# Altium PCB Multi_HUTSCHIENE_1_1.PcbDoc (part 1 of 2)
Units mm, origin at the board's own origin, x right, y up, seen from the top; angles counter-clockwise.
Board outline 29.21 x 81.99 mm, 4 copper layers (Top Layer, 3V3, GND, Bottom Layer), stack 0.778 mm thick; 60 components, 54 nets, 683 pads, 83 vias.
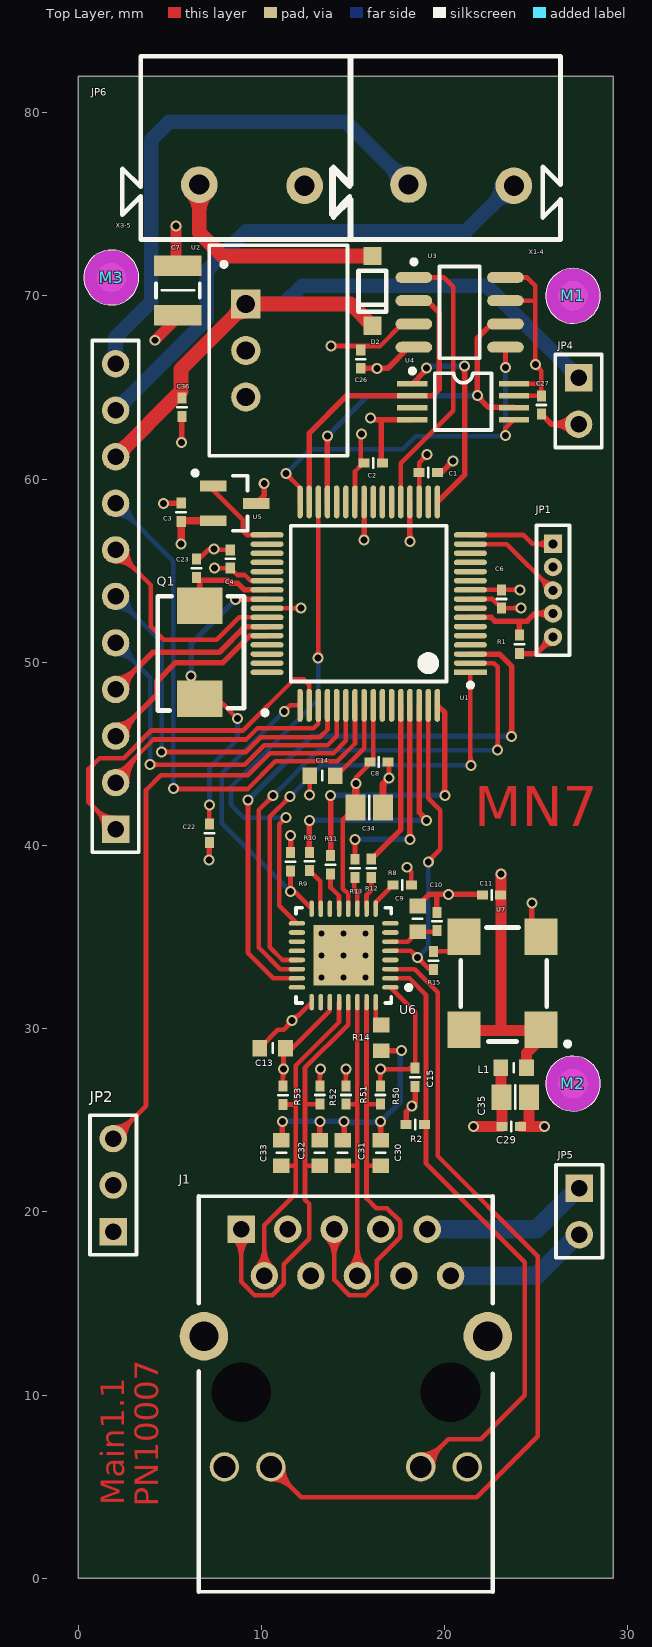
[diagram p0: Top Layer view]
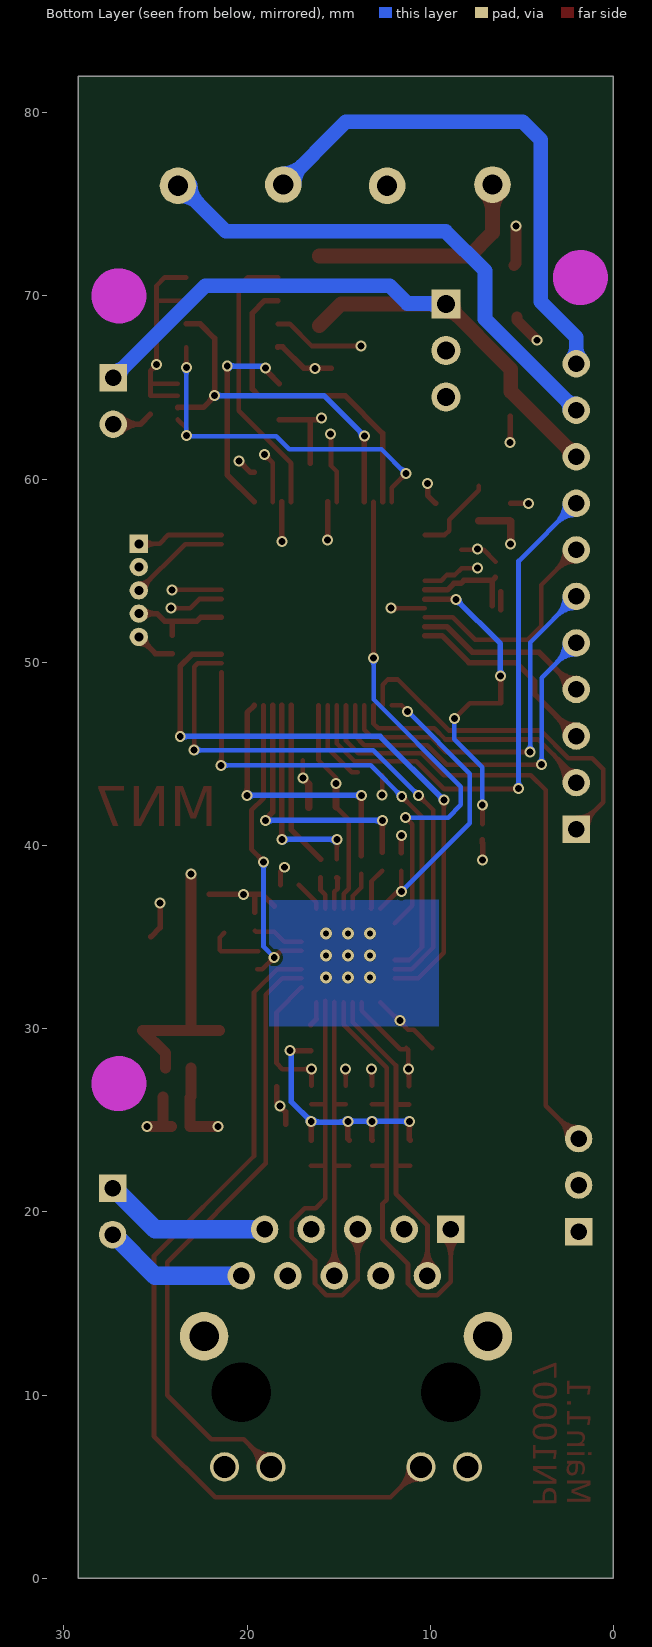
[diagram p1: Bottom Layer view, seen from below]
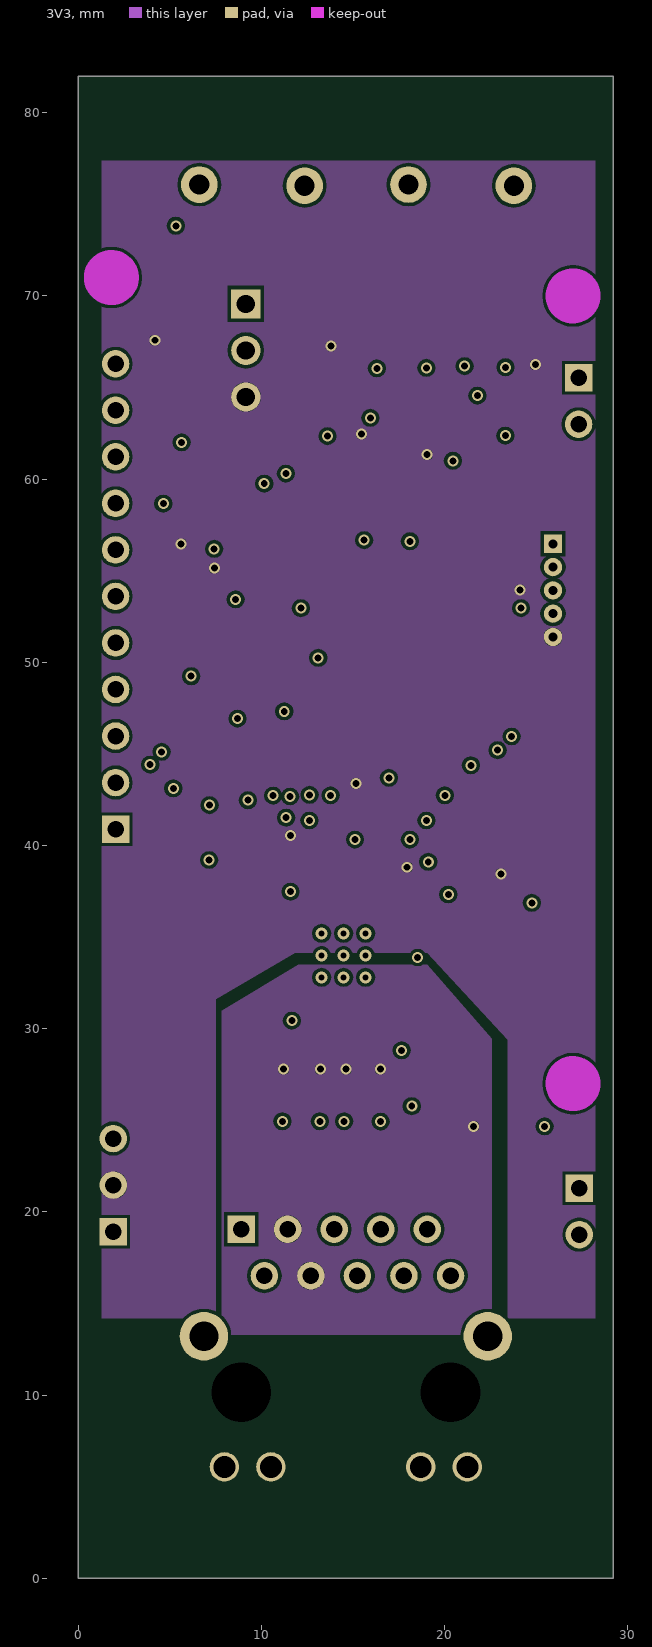
[diagram p2: 3V3]
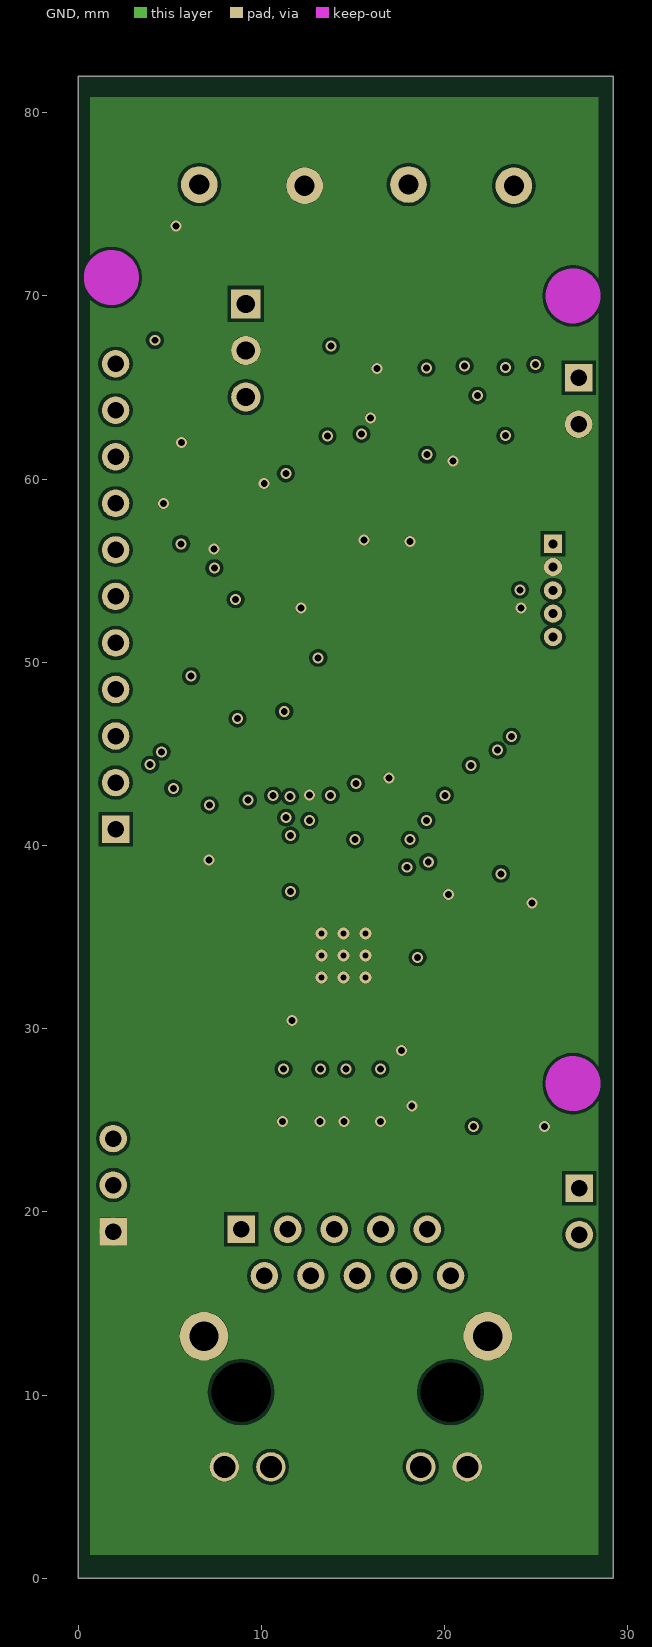
[diagram p3: GND]

## Layer stack, top to bottom
Top Solder: solder mask 0.0102, Solder Resist, Dk 3.5
Top Layer: signal copper 0.0356
Dielectric 1: core 0.254, FR-4, Dk 4.2
3V3: signal copper 0.036
Dielectric 3: prepreg 0.127, Dk 4.2
GND: signal copper 0.036
Dielectric 2: core 0.254, Dk 4.2
Bottom Layer: signal copper 0.0356
Bottom Solder: solder mask 0.0102, Solder Resist, Dk 3.5

## Board outline
0,0 0,81.991 29.21,81.991 29.21,0

## Design rules (kind name [scope] priority, off if disabled: settings)
Clearance AT90 [IsPad vs IsPad] p1: gap=0.1
Clearance [All] p2: gap=0.18
ComponentClearance Board1 [((id='Multi_HITSCHIENE_POE')  OR (id='Multi_HUTSCHIENE_EXT_1_1'))] p1: gap=0 collisioncheckmode=3 verticalgap=0 showdistances=FALSE
ComponentClearance Case [id='00010333'] p2: gap=0 collisioncheckmode=3 verticalgap=0 showdistances=FALSE
ComponentClearance ComponentClearance_1 [(HasFootprint('WAGO-243-211') AND HasFootprint('WAGO-243-211'))] p3: gap=0 collisioncheckmode=3 verticalgap=0 showdistances=FALSE
ComponentClearance [All] p4: gap=0.254 collisioncheckmode=3 verticalgap=0.254 showdistances=FALSE
HoleSize [All] p1: absolutevalues=TRUE maxlimit=4 minlimit=0.025 maxpercent=80.000 minpercent=20.000
MinimumAnnularRing [HasFootprint('32M1-A_M')] p1: minimumring=0.12
MinimumSolderMaskSliver MinimumSolderMaskSliver_2 [HasFootprint('HDR1X5-1.27')] p1: minsoldermaskwidth=0.05
MinimumSolderMaskSliver MinimumSolderMaskSliver_1 [HasFootprint('32M1-A_M')] p2: minsoldermaskwidth=0
MinimumSolderMaskSliver [All] p3: minsoldermaskwidth=0.1
PolygonConnect [All vs (InNet('GND') AND InPadClass('All Pads'))] p1: connectstyle=Relief reliefconductorwidth=0.254 reliefentries=4 polygonreliefangle="90 Angle" airgapwidth=0
RoomDefinition Ethernet [InComponentClass('Ethernet')] p1: confinementstyle=ConfineIn formatcopy=TRUE lockcomponents=FALSE outline -7.874,-2.972 48.336,-2.972 48.336,87.249 -7.874,87.249
RoomDefinition MCU [InComponentClass('MCU')] p2: confinementstyle=ConfineIn formatcopy=TRUE lockcomponents=FALSE outline -6.35,-3.334 50.838,-3.334 50.838,86.36 -6.35,86.36
RoutingVias [All] p1: holewidth=0.381 width=0.584 viastyle="Through Hole" minholewidth=0.3 minwidth=0.3 maxholewidth=0.711 maxwidth=1.27
ShortCircuit ShortCircuit_1 [U6 vs IsVia] p1: allowed=TRUE
ShortCircuit [All] p2: allowed=FALSE
SilkToBoardRegionClearance [(HasFootprint('7499210121A') AND IsEmbeddedBoard)] p1:
SilkToSilkClearance [All] p1: silktosilkclearance=0.13
SilkToSolderMaskClearance [IsPad] p1: minsilkscreentomaskgap=0.13 clearancetoexposedcopper=TRUE
SolderMaskExpansion [All] p1: expansion=0.102
UnpouredPolygon [All] p1: allowunpoured=FALSE
Width [All] p1: maxlimit=2 minlimit=0.254 preferedwidth=0.254
22 further rules are at their usual default settings.

## Classes and differential pairs
component class Ethernet: C9 C10 C11 C13 C15 C29 C30 C31 C32 C33 C34 C35 J1 JP4 JP5 L1 R2 R8 R9 R10 R11 R12 R13 R14 R15 R50 R51 R52 R53 U6 U7
component class MCU: C1 C2 C3 C4 C6 C7 C8 C14 C22 C23 C26 C27 C36 D2 JP1 JP2 JP6 M1 M2 M3 Q1 R1 U1 U2 U3 U4 U5 X1-4 X3-5

## Components (designator, comment, footprint, x,y, rotation, side; value= is the part's Value field where it differs from the comment)
C1 "100nF16V_0402" C0402 19.101,60.363 r0 top
C2 "100nF16V_0402" C0402 16.104,60.871 r0 top
C3 "100nF16V_0402" C0402 5.613,58.191 r90 top
C4 "100nF16V_0402" C0402 8.293,55.639 r90 top
C6 "100nF16V_0402" C0402 23.101,53.454 r270 top
C7 "10uF25V_1210" C1210 5.436,70.294 r90 top
C8 "100nF25V_0402" C0402 16.408,44.552 r0 top
C9 "1uF50V_0603" C0603 18.517,35.992 r90 top
C10 "470pF50V_0402" C0402 19.571,35.852 r90 top
C11 "100nF16V_0402" C0402 22.555,37.287 r180 top
C13 "22nF50V_0603" C0603 10.604,28.943 r180 top
C14 "10uF10V_0603" C0603 13.322,43.815 r180 top
C15 "100nF25V_0402" C0402 18.377,27.343 r270 top
C22 "22pF50V_0402" C0402 7.15,40.665 r270 top
C23 "22pF50V_0402" C0402 6.452,55.131 r90 top
C26 "100nF16V_0402" C0402 15.418,66.548 r270 top
C27 "100nF16V_0402" C0402 25.273,64.041 r270 top
C29 "100nF25V_0402" C0402 23.622,24.663 r0 top
C30 "10pF50V_0603" C0603 16.51,23.216 r90 top
C31 "10pF50V_0603" C0603 14.427,23.216 r90 top
C32 "10pF50V_0603" C0603 13.17,23.216 r90 top
C33 "10pF50V_0603" C0603 11.087,23.216 r90 top
C34 "4u7F25V_0805" C0805 15.875,42.075 r0 top
C35 "4u7F25V_0805" C0805 23.851,26.264 r0 top
C36 "100nF25V_0402" C0402 5.651,63.919 r270 top
D2 "SD103AW-V-GS08" SOD123 16.053,70.269 r270 top
J1 "7499210121A" 7499210121A 14.6,10.16 r180 top locked
JP1 "ICDI" HDR1X5-1.27 25.908,53.924 r270 top
JP2 "Header-3" HDR1X3 1.905,21.463 r90 top
JP4 "Header-2" HDR1X2 27.305,64.262 r270 top
JP5 "Header-2" HDR1X2 27.343,20.028 r270 top
JP6 "Header 11_2.54" HDR1X11_2.54 2.032,53.594 r90 top
L1 "120R4A_0603" L0603 23.762,27.864 r0 top
M1 "Mark" Mark-3mm 27,70 r0 top
M2 "Mark" Mark-3mm 27,27 r0 top
M3 "Mark" Mark-3mm 1.8,71 r0 top
Q1 "7A-8.000MAAJ-T" TXC_7A 6.629,50.546 r90 top
R1 "10k_0402" R0402 24.079,50.978 r270 top
R2 "10k_0402" R0402 18.39,24.778 r0 top
R8 "10k_0402" R0402 17.678,37.846 r0 top
R9 "1k5_0402" R0402 11.582,39.103 r90 top
R10 "10R_0402" R0402 12.624,39.129 r90 top
R11 "10R_0402" R0402 13.767,38.951 r90 top
R12 "10R_0402" R0402 15.989,38.76 r270 top
R13 "10R_0402" R0402 15.1,38.748 r90 top
R14 "12k1_0603" R0603(1608) 16.535,29.502 r90 top
R15 "33R_0402" R0402 19.393,33.718 r270 top
R50 "49R9_0402" R0402 16.485,26.378 r90 top
R51 "49R9_0402" R0402 14.605,26.378 r90 top
R52 "49R9_0402" R0402 13.183,26.378 r90 top
R53 "49R9_0402" R0402 11.163,26.365 r90 top
U1 "PIC32MX695F512H-80I/PT" TQFP-64_N1 15.85,53.2 r180 top
U2 "R-783.3-0.5" R-783_3-0_5 9.144,67.018 r270 top
U3 "25LC1024-I_SM" SOP8_N 20.815,69.101 r0 top
U4 "23LC1024-I_ST" TSSOP8 21.006,64.224 r270 top
U5 "11AA02E48T-I_TT" SOT23_M 8.534,58.674 r0 top
U6 "LAN8741-EN" 32M1-A_M 14.482,34 r180 top
U7 "TXC-7W-50.000MBB-T" TXC_7W 23.152,32.474 r90 top
X1-4 "Terminal-Wago_2" WAGO-243-211 20.896,76.01 r0 top
X3-5 "Terminal-Wago_2" WAGO-243-211 9.479,76.01 r0 top

## Footprints (in the part's own frame and the unit in brackets; to place one, negate y for a bottom-side part, rotate by r counter-clockwise, add the part's x,y. Pads: shape width x height; smd on the part's side, far side on the other; paste and mask are expansions set on the pad)
32M1-A_M [mm] "QFN, 32-Leads, Body 5x5mm, Pitch 0.5mm, IPC Low Density"
  oval 0.9x0.25 smd: 1(-2.55,1.75) 2(-2.55,1.25) 3(-2.55,0.75) 4(-2.55,0.25) 5(-2.55,-0.25) 6(-2.55,-0.75) 7(-2.55,-1.25) 8(-2.55,-1.75) 17(2.55,-1.75) 18(2.55,-1.25) 19(2.55,-0.75) 20(2.55,-0.25) 21(2.55,0.25) 22(2.55,0.75) 23(2.55,1.25) 24(2.55,1.75)
  oval 0.25x0.9 smd: 9(-1.75,-2.55) 10(-1.25,-2.55) 11(-0.75,-2.55) 12(-0.25,-2.55) 13(0.25,-2.55) 14(0.75,-2.55) 15(1.25,-2.55) 16(1.75,-2.55) 25(1.75,2.55) 26(1.25,2.55) 27(0.75,2.55) 28(0.25,2.55) 29(-0.25,2.55) 30(-0.75,2.55) 31(-1.25,2.55) 32(-1.75,2.55)
  rect 3.3x3.3 smd: 33(0,0)
  silkscreen extent -3.68,-2.6 2.6,2.6, body extent -2.58,-2.58 2.58,2.58, height 1
7499210121A [mm] "Connector; PCB Jack, Thru-Hole; RJ45,POE; Shielded with Lightpipes; Right Angle"
  rect 1.5x1.5 hole 0.9: 1(5.715,-8.89)
  round 1.5 hole 0.9: 2(4.445,-6.35) 3(3.175,-8.89) 4(1.905,-6.35) 5(0.635,-8.89) 6(-0.635,-6.35) 7(-1.905,-8.89) 8(-3.175,-6.35) 9(-4.445,-8.89) 10(-5.715,-6.35)
  round 1.6 hole 1.2: 11(4.09,4.08) 12(6.63,4.08) 13(-4.09,4.08) 14(-6.63,4.08)
  round 2.65 hole 1.6: MH1(-7.745,-3.05) MH2(7.745,-3.05)
  round 2.95 hole 3.25 unplated: MH3(-5.715,0) MH4(5.715,0)
  silkscreen extent -8.02,-10.7 8.02,10.89, body extent -8,-10.67 8,11.18, height 13.74
C0402 [mm] "Chip Capacitor, Body 1.0x0.5mm, IPC High Density"
  rect 0.6x0.5 smd: 1(-0.5,0) 2(0.5,0)
  silkscreen extent 0,-0.25 0,0.25, body extent -0.55,-0.3 0.55,0.3, height 0.5
C0603 [mm] "Chip Capacitor, 0603"
  rect 0.8x0.9 smd: 1(-0.7,0) 2(0.7,0)
  silkscreen extent 0,-0.25 0,0.25, body extent -0.87,-0.48 0.87,0.48, height 0.6
C0805 [mm] "Chip Capacitor, Body 2.0x1.3mm, IPC High Density"
  rect 1.1x1.4 smd: 1(-0.75,0) 2(0.75,0)
  silkscreen extent 0,-0.64 0,0.64, body extent -1.1,-0.72 1.1,0.72, height 1.4
C1210 [mm] "Chip Capacitor, Body 3.2x2.5mm, IPC High Density"
  rect 1.1x2.6 smd: 1(-1.35,0) 2(1.35,0)
  silkscreen extent -0.4,-1.2 0.4,1.2, body extent -1.7,-1.35 1.7,1.35, height 1.3
HDR1X2 [mm] "Connector; Header; 2 Position"
  rect 1.5x1.5 hole 0.9: 1(-1.27,0)
  round 1.5 hole 0.9: 2(1.27,0)
  silkscreen extent -2.54,-1.27 2.54,1.27, body extent -2.54,-1.27 2.54,1.27, height 7
HDR1X3 [mm] "Connector; Header; 3 Position"
  rect 1.5x1.5 hole 0.9: 1(-2.54,0)
  round 1.5 hole 0.9: 2(0,0) 3(2.54,0)
  silkscreen extent -3.81,-1.27 3.81,1.27, body extent -3.81,-1.27 3.81,1.27, height 7
HDR1X5-1.27 [mm] "Connector; Header; 5 Position"
  rect 1x1 hole 0.5: 1(-2.54,0)
  round 1 hole 0.5: 2(-1.27,0) 3(0,0) 4(1.27,0) 5(2.54,0)
  silkscreen extent -3.55,-0.9 3.55,0.9, body extent -3.56,-0.89 3.56,0.89, height 7
HDR1X11_2.54 [mm] "Connector; Header; 11 Position"
  rect 1.5x1.5 hole 0.9: 1(-12.7,0)
  round 1.5 hole 0.9: 2(-10.16,0) 3(-7.62,0) 4(-5.08,0) 5(-2.54,0) 6(0,0) 7(2.54,0) 8(5.08,0) 9(7.62,0) 10(10.16,0) 11(12.7,0)
  silkscreen extent -13.97,-1.27 13.97,1.27, body extent -13.97,-1.27 13.97,1.27, height 7
L0603 [mm] "Chip Ferrit, 0603"
  rect 0.8x0.9 smd: 1(-0.7,0) 2(0.7,0)
  silkscreen extent 0,-0.25 0,0.25, body extent -0.87,-0.48 0.87,0.48, height 0.6
Mark-3mm [mm]
  round 1.6 smd paste-2: 0(0,0)
  Keep-Out Layer circle w2: c0,0 r0.5
  silkscreen extent -1.5,-1.5 1.5,1.5
R0402 [mm] "Chip Resistor, Body 1.0x0.5mm"
  rect 0.6x0.5 smd: 1(-0.5,0) 2(0.5,0)
  silkscreen extent 0,-0.25 0,0.25, body extent -0.55,-0.3 0.55,0.3, height 0.55
R0603(1608) [mm] "Chip Resistor, 0603"
  rect 0.8x0.9 smd: 1(-0.7,0) 2(0.7,0)
  body extent -0.87,-0.48 0.87,0.48, height 0.6
R-783_3-0_5 [mm] "Recon DC-DC"
  rect 1.6x1.6 hole 1: 1(-2.54,0)
  round 1.6 hole 1: 2(0,0) 3(2.54,0)
  silkscreen extent -5.75,-2 5.75,5.55, body extent -5.72,-2.03 5.72,5.59, height 10.2
SOD123 [mm]
  rect 1x1 smd: 1(1.905,0) 2(-1.905,0)
  silkscreen extent -1.1,-0.76 1.14,0.76, body extent -1.4,-0.85 1.4,0.88, height 1.4
SOP8_N [mm] "SOIC, 8-Leads, Body 4.9x3.9mm, Pitch 1.27mm, IPC Medium Density"
  oval 2x0.6 smd: 1(-2.5,1.905) 2(-2.5,0.635) 3(-2.5,-0.635) 4(-2.5,-1.905) 5(2.5,-1.905) 6(2.5,-0.635) 7(2.5,0.635) 8(2.5,1.905)
  silkscreen extent -2.62,-2.5 1.1,2.88, body extent -2,-2.5 2,2.5, height 1.75
SOT23_M [mm] "SOT23, 3-Leads, Body 2.9x1.3mm, Pitch 0.95mm, Lead Span 2.3mm - Reverse Pinning, IPC Low Density"
  rect 1.45x0.6 smd: 1(1.175,0) 2(-1.175,-0.95) 3(-1.175,0.95)
  silkscreen extent -2.28,-1.5 0.7,1.78, body extent -0.7,-1.5 0.7,1.5, height 1.1
TQFP-64_N1 [mm] "64-Pin Thin Plastic Quad Flat Pack 0.5 mm Pitch, 1.0/0.1 mm Lead Form, IPC Medium Density"
  rect 1.8x0.3 smd: 1(-5.55,3.75)
  oval 1.8x0.3 smd: 2(-5.55,3.25) 3(-5.55,2.75) 4(-5.55,2.25) 5(-5.55,1.75) 6(-5.55,1.25) 7(-5.55,0.75) 8(-5.55,0.25) 9(-5.55,-0.25) 10(-5.55,-0.75) 11(-5.55,-1.25) 12(-5.55,-1.75) 13(-5.55,-2.25) 14(-5.55,-2.75) 15(-5.55,-3.25) 16(-5.55,-3.75) 33(5.55,-3.75) 34(5.55,-3.25) 35(5.55,-2.75) 36(5.55,-2.25) 37(5.55,-1.75) 38(5.55,-1.25) 39(5.55,-0.75) 40(5.55,-0.25) 41(5.55,0.25) 42(5.55,0.75) 43(5.55,1.25) 44(5.55,1.75) 45(5.55,2.25) 46(5.55,2.75) 47(5.55,3.25) 48(5.55,3.75)
  oval 0.3x1.8 smd: 17(-3.75,-5.55) 18(-3.25,-5.55) 19(-2.75,-5.55) 20(-2.25,-5.55) 21(-1.75,-5.55) 22(-1.25,-5.55) 23(-0.75,-5.55) 24(-0.25,-5.55) 25(0.25,-5.55) 26(0.75,-5.55) 27(1.25,-5.55) 28(1.75,-5.55) 29(2.25,-5.55) 30(2.75,-5.55) 31(3.25,-5.55) 32(3.75,-5.55) 49(3.75,5.55) 50(3.25,5.55) 51(2.75,5.55) 52(2.25,5.55) 53(1.75,5.55) 54(1.25,5.55) 55(0.75,5.55) 56(0.25,5.55) 57(-0.25,5.55) 58(-0.75,5.55) 59(-1.25,5.55) 60(-1.75,5.55) 61(-2.25,5.55) 62(-2.75,5.55) 63(-3.25,5.55) 64(-3.75,5.55)
  silkscreen extent -5.68,-4.25 4.25,4.57, body extent -5,-5 5,5, height 1.2
TSSOP8 [mm] "Shrink Small Outline, Plastic, Thin; 8 Leads; Body Width 4.4 mm; Pitch 0.65 mm"
  rect 0.3x1.65 smd: 1(-0.975,-2.775) 2(-0.325,-2.775) 3(0.325,-2.775) 4(0.975,-2.775) 5(0.975,2.775) 6(0.325,2.775) 7(-0.325,2.775) 8(-0.975,2.775)
  silkscreen extent -1.8,-2.9 1.55,1.55, body extent -1.52,-1.52 1.52,1.52, height 1
TXC_7A [mm]
  rect 2x2.5 smd: 1(-2.54,0) 2(2.54,0)
  silkscreen extent -3.43,-3.68 3.05,2.29, body extent -3.17,-2.41 3.05,2.25, height 1.3
TXC_7W [mm]
  rect 2x1.8 smd: 1(-2.54,-2.1) 2(2.54,-2.1) 3(2.54,2.1) 4(-2.54,2.1)
  silkscreen extent -3.43,-3.68 3.05,2.29, body extent -3.17,-2.41 3.05,2.25, height 1.3
WAGO-243-211 [mm]
  round 2 hole 1.1: 1(-2.875,0.064) 2(2.875,0)
  silkscreen extent -7.07,-2.94 5.43,7.06, body extent -7.07,-2.98 5.44,7.12, height 10

## Part data
C1 C2 C3 C4 C6 C7 C11 C14 C26 C27: "Capacitor"
C8 C15 C29 C36: "AVX, X5R, 10%, 25V"
C9: "C series, X5R, 10%"
C10: "AVX, 50V"
C13: "AVX ,  X7R, 5%, 50V"
C22 C23: "Murata, GRM series, 50V"
C30 C31 C32 C33: "AVX ,  +-0.5pF, 50V"
C34 C35: "TDK  C series, X7R, 10%, 25V"
D2: "Diode Schottky,2A,40V"
J1: library part "Ethernet, POE, WE7499210121A", "Modular Jack , Right Angle RJ-45, Low Profile"
JP1 JP4 JP5: "Header, 5-Pin"
JP2: "Header-3-Pin"
JP6: "Header, 11-Pin"
L1: "Murata, Ferrit, 120Rx2A"
Q1: library part Crystal_8MHz, "Crystal, 7A-8.000MAAJ-T"
R1 R2 R8 R9 R10 R11 R12 R13: "Vishay CRCW series, 125mW, 1%"
R14: "Vishay, CRCW series, 100mW, 1%"
R15 R50 R51 R52 R53: "Vishay CRCW series, 63mW, 1%"
U1: "High Performance ROM-less Microcontroller with External Memory Bus, 1.5K RAM, 64-Pin TQFP, 4.2 to 5.5V Supply Range, Industrial Temperature"
U2: library part Recom-R-783_3-0_5, "Voltage Regulator"
U3: "1024 Kbit Serial SPI Bus EEPROM"
U4: "1 Mbit Serial  EEPROM"
U5: "2 kbit Serial  EEPROM"
U6: "Ethernet Phy"
U7: "Crystal"
X1-4 X3-5: "Wago terminal-2"

## Free pads (board coordinates)
  round 0.584 on Mech13: 1(1.981,29.058) 1(2.515,38.684) 1(3.505,27.203) 1(4.724,24.308) 1(4.851,30.328) 1(5.512,71.196) 1(5.664,62.382) 1(5.994,63.703) 1(5.994,65.684) 1(5.994,67.183) 1(7.01,35.687) 1(7.01,40.183) 1(8.407,59.182) 1(8.509,36.703) 1(8.661,24.181) 1(8.712,29.388) 1(8.712,32.309) 1(8.992,53.188) 1(9.119,54.966) 1(9.525,25.578) 1(10.008,41.707) 1(12.014,44.602) 1(12.014,51.689) 1(12.014,60.706) 1(12.497,34.696) 1(12.497,46.203) 1(12.7,40.03) 1(12.751,56.109) 1(13.513,46.355) 1(13.767,71.171) 1(13.995,44.704) 1(14.021,50.8) 1(14.503,30.683) 1(14.503,36.195) 1(14.503,37.186) 1(14.503,38.202) 1(14.503,57.201) 1(14.834,66.192) 1(15.189,40.691) 1(15.443,60.731) 1(15.494,24.206) 1(15.494,36.195) 1(15.494,37.186) 1(15.494,38.202) 1(16.231,46.203) 1(16.51,36.195) 1(16.51,37.186) 1(16.51,38.202) 1(16.51,52.705) 1(16.993,46.203) 1(17.501,44.704) 1(18.517,31.699) 1(19.05,40.462) 1(19.507,39.192) 1(19.71,54.102) 1(20.168,31.445) 1(20.498,24.206) 1(20.498,32.207) 1(21.006,28.702)
  round 0.584 on Mech15: 1(1.981,29.058) 1(2.515,38.684) 1(3.505,27.203) 1(4.724,24.308) 1(4.851,30.328) 1(5.512,71.196) 1(5.664,62.382) 1(5.994,63.703) 1(5.994,65.684) 1(5.994,67.183) 1(7.01,35.687) 1(7.01,40.183) 1(8.407,59.182) 1(8.509,36.703) 1(8.661,24.181) 1(8.712,29.388) 1(8.712,32.309) 1(8.992,53.188) 1(9.119,54.966) 1(9.525,25.578) 1(10.008,41.707) 1(12.014,44.602) 1(12.014,51.689) 1(12.014,60.706) 1(12.497,34.696) 1(12.497,46.203) 1(12.7,40.03) 1(12.751,56.109) 1(13.513,46.355) 1(13.767,71.171) 1(13.995,44.704) 1(14.021,50.8) 1(14.503,30.683) 1(14.503,36.195) 1(14.503,37.186) 1(14.503,38.202) 1(14.503,57.201) 1(14.834,66.192) 1(15.189,40.691) 1(15.443,60.731) 1(15.494,24.206) 1(15.494,36.195) 1(15.494,37.186) 1(15.494,38.202) 1(16.231,46.203) 1(16.51,36.195) 1(16.51,37.186) 1(16.51,38.202) 1(16.51,52.705) 1(16.993,46.203) 1(17.501,44.704) 1(18.517,31.699) 1(19.05,40.462) 1(19.507,39.192) 1(19.71,54.102) 1(20.168,31.445) 1(20.498,24.206) 1(20.498,32.207) 1(21.006,28.702)
  oval 3.048x1.524 on Mech13: 1(2.007,18.923) 1(2.007,21.463) 1(2.007,24.003) 1(2.007,40.996) 1(2.007,43.536) 1(2.007,46.076) 1(2.007,48.616) 1(2.007,51.156) 1(2.007,53.696) 1(2.007,56.236) 1(2.007,58.776) 1(2.007,61.316) 1(2.007,63.856) 1(2.007,66.396) 1(18.644,63.221) 1(18.644,65.761) 1(18.644,68.301) 1(27.254,18.821) 1(27.254,21.361) 1(27.305,62.967) 1(27.305,65.507)
  oval 3.048x1.524 on Mech15: 1(2.007,18.923) 1(2.007,21.463) 1(2.007,24.003) 1(2.007,40.996) 1(2.007,43.536) 1(2.007,46.076) 1(2.007,48.616) 1(2.007,51.156) 1(2.007,53.696) 1(2.007,56.236) 1(2.007,58.776) 1(2.007,61.316) 1(2.007,63.856) 1(2.007,66.396) 1(18.644,63.221) 1(18.644,65.761) 1(18.644,68.301) 1(27.254,18.821) 1(27.254,21.361) 1(27.305,62.967) 1(27.305,65.507)
  rect 1.118x1.016 on Mech15: 1(2.02,30.074) 1(3.734,30.074) 1(8.28,22.555) 1(9.754,34.976) 1(9.994,22.555) 1(11.467,34.976) 1(11.862,41.72) 1(11.862,43.434) 1(12.18,26.035) 1(13.894,26.035) 1(13.894,41.72) 1(13.894,43.434) 1(15.316,26.035) 1(15.9,41.72) 1(15.9,43.434) 1(16.561,53.746) 1(17.03,26.035) 1(17.819,33.147) 1(17.932,41.72) 1(17.932,43.434) 1(18.274,53.746) 1(19.241,22.555) 1(19.533,33.147) 1(20.955,22.555)
  rect 1.524x1.6 on Mech15: 1(2.24,32.019) 1(2.24,37.135) 1(6.045,32.019) 1(6.045,37.135)
  rect 1.016x1.118 on Mech15: 1(4.953,25.476) 1(4.953,27.19) 1(6.033,39.065) 1(7.747,39.065) 1(7.823,53.264) 1(7.823,54.977) 1(8.421,30.683) 1(9.322,26.684) 1(9.322,28.397) 1(9.423,38.723) 1(9.423,40.437) 1(9.779,32.944) 1(10.135,30.683) 1(11.455,38.698) 1(11.455,40.411) 1(11.493,32.944) 1(11.786,56.947) 1(11.786,58.66) 1(12.167,29.185) 1(13.88,29.185) 1(14.021,48.045) 1(14.021,49.759) 1(14.122,22.67) 1(14.122,24.384) 1(15.279,29.21) 1(15.596,57.023) 1(15.596,58.737) 1(16.993,29.21) 1(19.152,30.175) 1(20.865,30.175)
  rect 1.016x1.422 on Mech13: 1(5.248,58.971) 1(6.198,61.189) 1(7.163,58.971)
  rect 1.016x1.118 on Mech13: 1(6.121,68.199) 1(6.121,69.913) 1(7.137,63.703) 1(7.137,65.417) 1(14.212,41.758) 1(15.926,41.758) 1(17.221,41.758) 1(18.935,41.758)
  rect 0.864x0.711 on Mech15: 1(6.288,27.33) 1(7.899,27.33)
  round 1.676 on Mech13: 1(6.452,76.2) 1(12.192,76.2) 1(17.932,76.2) 1(23.698,76.2)
  round 1.676 on Mech15: 1(6.452,76.2) 1(12.192,76.2) 1(17.932,76.2) 1(23.698,76.2)
  round 2.362 on Mech13: 1(6.782,13.335) 1(22.276,13.335)
  round 2.362 on Mech15: 1(6.782,13.335) 1(22.276,13.335)
  rect 1.118x1.016 on Mech13: 1(7.01,37.338) 1(7.01,39.052) 1(16.092,39.726) 1(17.805,39.726) 1(23.012,51.791) 1(23.012,53.504)
  rect 1.473x0.279 on Mech13: 1(7.264,49.555) 1(7.264,50.063) 1(7.264,50.571) 1(7.264,51.054) 1(7.264,51.562) 1(7.264,52.07) 1(7.264,52.553) 1(7.264,53.061) 1(7.264,53.569) 1(7.264,54.077) 1(7.264,54.559) 1(7.264,55.067) 1(7.264,55.575) 1(7.264,56.058) 1(7.264,56.566) 1(7.264,57.074) 1(18.491,49.555) 1(18.491,50.063) 1(18.491,50.571) 1(18.491,51.054) 1(18.491,51.562) 1(18.491,52.07) 1(18.491,52.553) 1(18.491,53.061) 1(18.491,53.569) 1(18.491,54.077) 1(18.491,54.559) 1(18.491,55.067) 1(18.491,55.575) 1(18.491,56.058) 1(18.491,56.566) 1(18.491,57.074)
  round 1.524 on Mech13: 1(7.747,5.715) 1(7.747,7.747) 1(21.311,5.715) 1(21.311,7.747)
  round 1.524 on Mech15: 1(7.747,5.715) 1(7.747,7.747) 1(21.311,5.715) 1(21.311,7.747)
  rect 2.21x0.61 on Mech13: 1(8.811,67.158) 1(8.811,68.428) 1(8.811,69.698) 1(8.811,70.968) 1(15.494,67.158) 1(15.494,68.428) 1(15.494,69.698) 1(15.494,70.968)
  round 3.2 on Mech13: 1(8.814,10.287) 1(20.244,10.287)
  round 3.2 on Mech15: 1(8.814,10.287) 1(20.244,10.287)
  round 1.333 on Mech13: 1(8.814,19.177) 1(10.084,16.637) 1(11.354,19.177) 1(12.624,16.637) 1(13.894,19.177) 1(15.164,16.637) 1(18.974,19.177) 1(20.244,16.637)
  round 1.333 on Mech15: 1(8.814,19.177) 1(10.084,16.637) 1(11.354,19.177) 1(12.624,16.637) 1(13.894,19.177) 1(15.164,16.637) 1(18.974,19.177) 1(20.244,16.637)
  round 0.61 on Mech13: 1(8.992,66.192) 1(9.449,62.535) 1(9.5,49.2) 1(10.008,50.19) 1(12.014,65.202) 1(13.945,62.535) 1(16.002,62.687) 1(17.501,59.182) 1(19.99,48.692) 1(20.676,49.403) 1(21.514,50.19)
  round 0.61 on Mech15: 1(8.992,66.192) 1(9.449,62.535) 1(9.5,49.2) 1(10.008,50.19) 1(12.014,65.202) 1(13.945,62.535) 1(16.002,62.687) 1(17.501,59.182) 1(19.99,48.692) 1(20.676,49.403) 1(21.514,50.19)
  rect 0.279x1.473 on Mech13: 1(9.119,47.701) 1(9.119,58.928) 1(9.627,47.701) 1(9.627,58.928) 1(10.135,47.701) 1(10.135,58.928) 1(10.617,47.701) 1(10.617,58.928) 1(11.125,47.701) 1(11.125,58.928) 1(11.633,47.701) 1(11.633,58.928) 1(12.116,47.701) 1(12.116,58.928) 1(12.624,47.701) 1(12.624,58.928) 1(13.132,47.701) 1(13.132,58.928) 1(13.64,47.701) 1(13.64,58.928) 1(14.122,47.701) 1(14.122,58.928) 1(14.63,47.701) 1(14.63,58.928) 1(15.138,47.701) 1(15.138,58.928) 1(15.621,47.701) 1(15.621,58.928) 1(16.129,47.701) 1(16.129,58.928) 1(16.637,47.701) 1(16.637,58.928)
  rect 1.219x0.356 on Mech13: 1(9.216,63.576) 1(9.216,64.237) 1(9.216,64.892) 1(9.216,65.542) 1(15.088,63.576) 1(15.088,64.237) 1(15.088,64.892) 1(15.088,65.542)
  rect 1.524x1.321 on Mech15: 1(12.014,48.299) 1(12.014,50.013)
  rect 0.813x0.305 on Mech15: 1(12.979,35.306) 1(12.979,35.814) 1(12.979,36.297) 1(12.979,36.805) 1(12.979,37.313) 1(12.979,37.821) 1(12.979,38.303) 1(12.979,38.811) 1(17.805,35.306) 1(17.805,35.814) 1(17.805,36.297) 1(17.805,36.805) 1(17.805,37.313) 1(17.805,37.821) 1(17.805,38.303) 1(17.805,38.811)
  rect 0.305x0.813 on Mech15: 1(13.64,34.646) 1(13.64,39.472) 1(14.148,34.646) 1(14.148,39.472) 1(14.63,34.646) 1(14.63,39.472) 1(15.138,34.646) 1(15.138,39.472) 1(15.646,34.646) 1(15.646,39.472) 1(16.154,34.646) 1(16.154,39.472) 1(16.637,34.646) 1(16.637,39.472) 1(17.145,34.646) 1(17.145,39.472)
  rect 3.302x3.302 on Mech15: 1(15.392,37.059)
  round 0.762 on Mech13: 1(21.26,52.197) 1(21.26,53.467) 1(21.26,54.737) 1(21.26,56.007)
  round 0.762 on Mech15: 1(21.26,52.197) 1(21.26,53.467) 1(21.26,54.737) 1(21.26,56.007)
  rect 0.762x0.762 on Mech13: 1(21.26,57.277)
  rect 0.762x0.762 on Mech15: 1(21.26,57.277)
  rect 0.813x1.6 on Mech15: 1(21.514,68.506) 1(21.514,71.907)
  rect 1.803x1.6 on Mech15: 1(21.996,62.786) 1(21.996,65.608)

## Via types
v1: diameter 0.6, hole 0.381, Top Layer to Bottom Layer, 74 vias
v2: diameter 0.66, hole 0.33, Top Layer to Bottom Layer, tented top, 9 vias

## Nets (pads, with @x,y where several pads share a name; then routed paths per layer and width w, separated by ;. In a path a pad name is that pad's centre, name@x,y a point inside that pad or via, vN(x,y) a via of type N, cw(c..) or ccw(c..) an arc to the next point about the centre after c; other vN are vias at no path point)
3V3: C1.1 C2.1 C3.1 C4.1 C6.1 C7.1 C8.1 C11.1 C26.1 C27.1 C34.1 JP1.5 JP2.2 L1.2 R1.2 R8.2 R9.2 U1.10 U1.19 U1.26 U1.38 U1.57 U2.3 U3.3 U3.7 U3.8 U4.7 U4.8 U5.2 U6.12 U7.1 U7.4 | length 71.4
  Top Layer w0.254: v1(7.421,55.139) C4.1@8.293,55.139 8.67,54.762 9.091,54.762 9.403,54.45 U1.38@10.3,54.45 ; v1(13.792,67.264) 16.477,67.264 17.678,68.466 U3.3@18.315,68.466 ; v1@13.915,67.142 cw(c14.21,66.847) 14.21,67.264 cw(c14.21,67.682) v1@13.915,67.386 ; U6.12@14.732,36.55 14.732,37.355 14.442,37.645 14.442,41.392 C34.1@15.125,42.075 ; U1.26@15.1,58.75 15.1,60.413 15.418,60.731 15.418,62.573 15.456,62.535 v1(15.456,62.452) v1@15.456,62.37 ; v1(15.146,43.383) 15.146,43.696 16.1,44.649 U1.57@16.1,47.65 ; v1(17.945,38.811) 18.178,38.578 R8.2@18.178,37.846 ; U1.19@18.6,58.75 C1.1@18.601,60.363 C1.1@18.601,60.363 18.601,60.892 v1(19.037,61.328) ; v1@18.864,61.328 cw(c18.447,61.328) 18.742,61.033 cw(c19.037,60.738) v1@19.037,61.155 ; U1.10@21.4,53.95 23.097,53.95 C6.1@23.101,53.954 v1(24.109,53.954) v1@24.206,54.051 ; U3.7@23.315,69.736 24.943,69.736 ; U3.8@23.315,71.006 24.486,71.006 24.943,70.549 24.943,69.736 ; U4.7@23.781,64.549 25.266,64.549 C27.1@25.273,64.541 25.273,65.151 ; U4.8@23.781,65.199 25.225,65.199 25.273,65.151 ; v1@23.987,53.832 ccw(c23.692,53.537) 23.692,53.954 ccw(c23.692,54.372) v1@23.987,54.077 ; v1@24.82,66.366 ccw(c24.525,66.661) 24.943,66.661 ccw(c25.36,66.661) v1@25.065,66.366 ; v1@24.943,66.07 cw(c24.943,65.653) 25.238,65.948 cw(c25.533,66.243) v1@25.116,66.243 ; 24.943,69.736 v1(24.943,66.243) 25.273,65.913 25.273,65.151
  Top Layer w0.3: R9.2@11.582,39.603 v1(11.582,40.55) v1@11.582,40.64 ; C34.1@15.125,42.075 C34.1@15.146,42.097 ; R1.2@24.079,50.478 25.002,50.478 JP1.5@25.908,51.384 ; JP1.5@25.558,51.384 cw(c24.713,51.384) 25.311,50.787 cw(c25.908,50.189) JP1.5@25.908,51.034
  Top Layer w0.4: v1(5.613,56.464) C3.1@5.613,57.691 5.646,57.724 U5.2@7.359,57.724 ; C34.1@15.146,42.097 v1(15.146,43.383)
  Top Layer w0.6: v1(4.178,67.577) 5.27,68.669 C7.1@5.27,68.856 ; U7.4@21.497,29.896 23.012,29.896 ; v1(23.063,38.456) 23.063,29.947 23.012,29.896 ; L1.2@24.462,27.864 24.462,28.661 25.697,29.896 23.012,29.896
12V: C36.1 D2.1 JP4.1 JP6.9 U2.1 | length 46
  Top Layer w0.8: JP6.9@2.032,61.214 5.601,64.783 5.601,66.002 9.157,69.558 14.859,69.558 D2.1@16.053,68.364 ; JP6.9@2.032,61.564 ccw(c2.032,62.409) 2.629,61.811 ccw(c3.227,61.214) JP6.9@2.382,61.214 ; U2.1@8.452,68.853 ccw(c7.748,69.558) U2.1@8.744,69.558 ; U2.1@8.483,68.884 cw(c9.144,68.223) U2.1@9.144,69.158 ; U2.1@9.427,69.275 cw(c10.11,68.592) 10.11,69.558 cw(c10.11,70.524) U2.1@9.427,69.841
  Bottom Layer w0.8: U2.1@9.427,69.275 cw(c10.171,68.531) 10.171,69.583 ; U2.1@9.427,69.841 ccw(c10.048,70.462) 10.048,69.583 ; U2.1@9.652,69.583 11.252,69.583 12.217,70.549 22.288,70.549 JP4.1@27.305,65.532 ; JP4.1@26.955,65.532 ccw(c26.11,65.532) 26.708,66.129 ccw(c27.305,66.727) JP4.1@27.305,65.882